# Altium PCB Forearm_GPT.PcbDoc
Units mil, origin at the board's own origin, x right, y up, seen from the top; angles counter-clockwise.
Board outline 10000 x 4500 mil, 2 copper layers (Top Layer, Bottom Layer); 9 components, 10 nets, 103 pads, 15 vias.
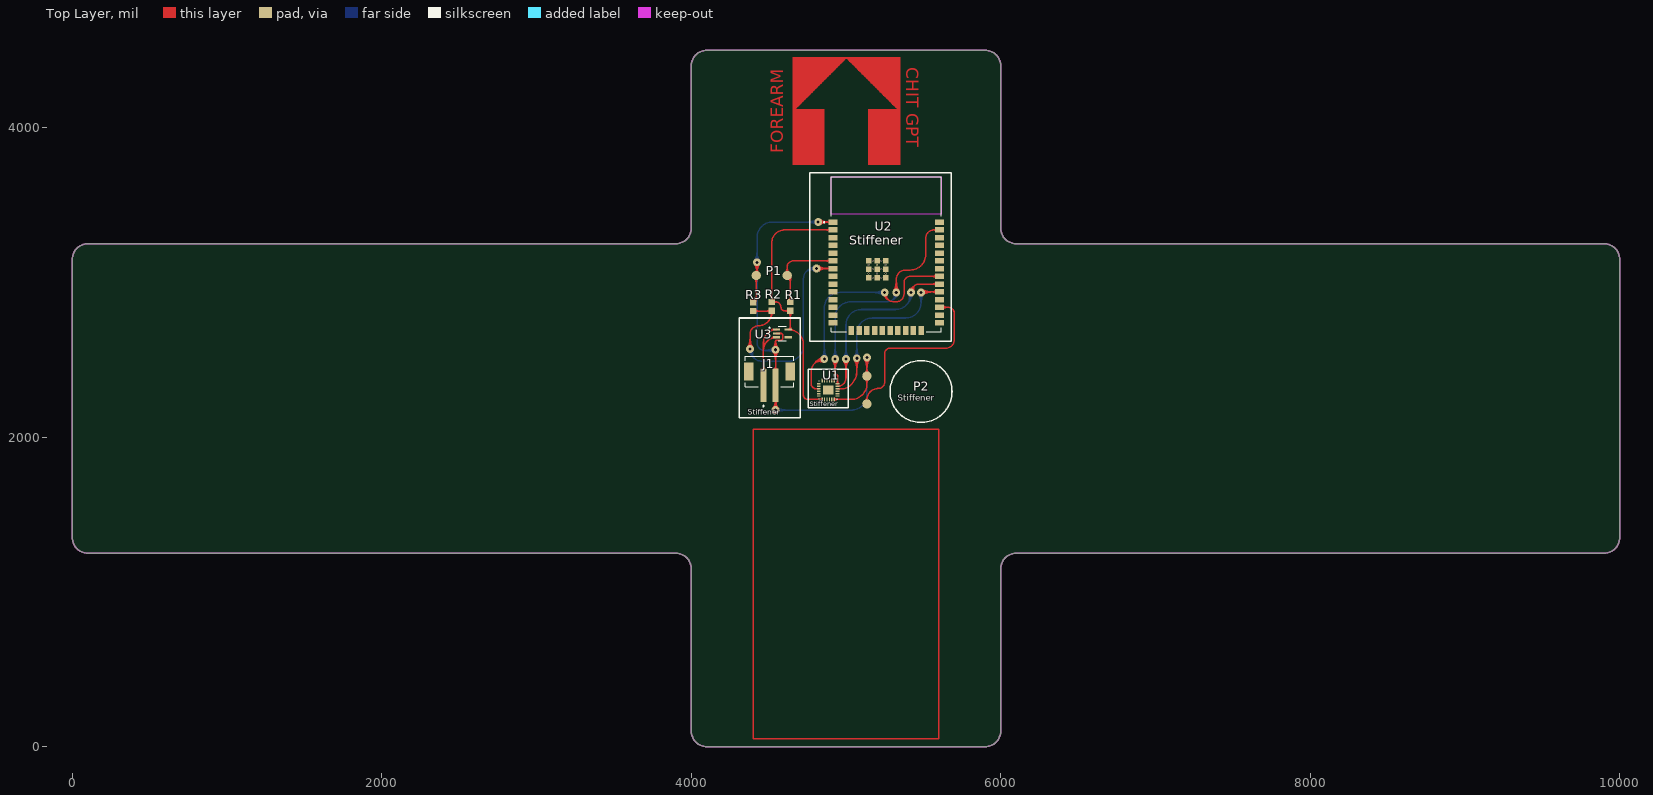
[diagram p0: Top Layer view]
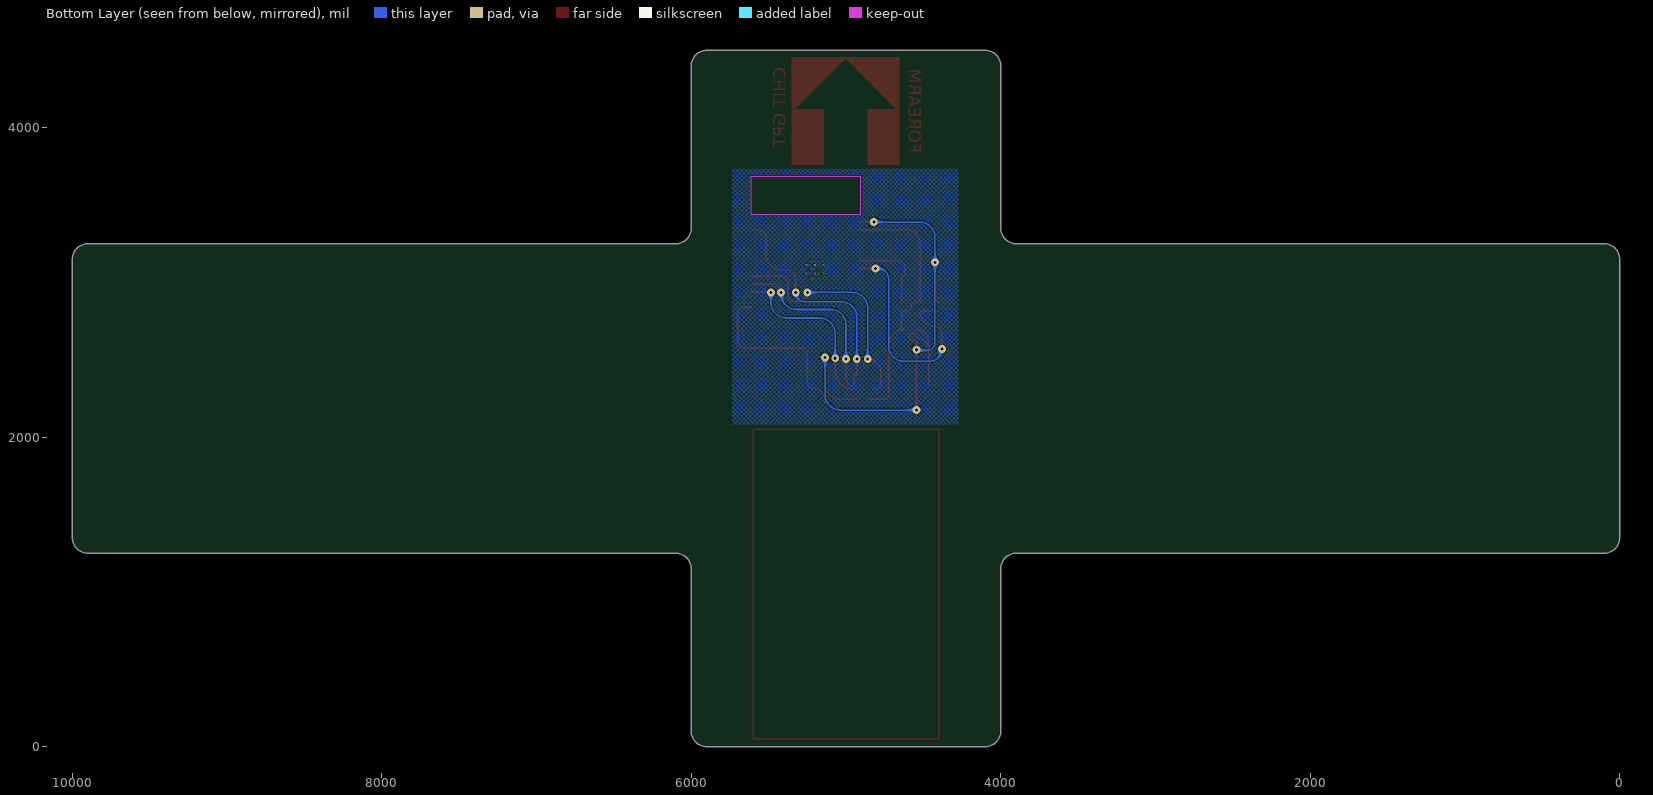
[diagram p1: Bottom Layer view, seen from below]

## Layer stack, top to bottom
Top Solder: solder mask 0.4724, FC-001, Dk 4
Top Solder: solder mask 0.4, Solder Resist, Dk 3.5
Top Layer: signal copper 1.4
Dielectric 1: dielectric 12.6, FR-4, Dk 4.8
Bottom Layer: signal copper 1.4
Flex Bottom Coverlay: solder mask 0.4, Solder Resist, Dk 3.5
Flex Bottom Coverlay: solder mask 0.4724, FC-001, Dk 4

## Board outline
100,1250 3900,1250 cw(c3900,1150) 4000,1150 4000,100 ccw(c4100,100) 4100,0 5900,0 ccw(c5900,100) 6000,100 6000,1150 cw(c6100,1150) 6100,1250 9900,1250 ccw(c9900,1350) 10000,1350 10000,3150 ccw(c9900,3150) 9900,3250 6100,3250 cw(c6100,3350) 6000,3350 6000,4400 ccw(c5900,4400) 5900,4500 4100,4500 ccw(c4100,4400) 4000,4400 4000,3350 cw(c3900,3350) 3900,3250 100,3250 ccw(c100,3150) 0,3150 0,1350 ccw(c100,1350)
board region Main: 5750,0 4250,0 4250,4500 5750,4500
board region "Right Strap": 4250,0 4100,0 4090.15,0 4070.83,3.84 4052.63,11.38 4036.25,22.32 4022.32,36.25 4011.38,52.63 4003.84,70.83 4000,90.15 4000,100 4000,1150 3999.52,1159.8 3995.69,1179.03 3988.19,1197.14 3977.3,1213.44 3963.44,1227.3 3947.14,1238.19 3929.03,1245.69 3909.8,1249.52 3900,1250 100,1250 90.15,1250 70.83,1253.84 52.63,1261.38 36.25,1272.32 22.32,1286.25 11.38,1302.63 3.84,1320.83 0,1340.15 0,1350 0,3150 0,3159.85 3.84,3179.17 11.38,3197.37 22.32,3213.75 36.25,3227.68 52.63,3238.62 70.83,3246.16 90.15,3250 100,3250 3900,3250 3909.8,3250.48 3929.03,3254.31 3947.14,3261.81 3963.44,3272.7 3977.3,3286.56 3988.19,3302.86 3995.69,3320.97 3999.52,3340.2 4000,3350 4000,4400 4000,4409.85 4003.84,4429.17 4011.38,4447.37 4022.32,4463.75 4036.25,4477.68 4052.63,4488.62 4070.83,4496.16 4090.15,4500 4100,4500 4250,4500
board region "Left Strap": 5750,4500 5900,4500 5909.85,4500 5929.17,4496.16 5947.37,4488.62 5963.75,4477.68 5977.68,4463.75 5988.62,4447.37 5996.16,4429.17 6000,4409.85 6000,4400 6000,3350 6000.48,3340.2 6004.31,3320.97 6011.81,3302.86 6022.7,3286.56 6036.56,3272.7 6052.86,3261.81 6070.97,3254.31 6090.2,3250.48 6100,3250 9900,3250 9909.85,3250 9929.17,3246.16 9947.37,3238.62 9963.75,3227.68 9977.68,3213.75 9988.62,3197.37 9996.16,3179.17 10000,3159.85 10000,3150 10000,1350 10000,1340.15 9996.16,1320.83 9988.62,1302.63 9977.68,1286.25 9963.75,1272.32 9947.37,1261.38 9929.17,1253.84 9909.85,1250 9900,1250 6100,1250 6090.2,1249.52 6070.97,1245.69 6052.86,1238.19 6036.56,1227.3 6022.7,1213.44 6011.81,1197.14 6004.31,1179.03 6000.48,1159.8 6000,1150 6000,100 6000,90.15 5996.16,70.83 5988.62,52.63 5977.68,36.25 5963.75,22.32 5947.37,11.38 5929.17,3.84 5909.85,0 5900,0 5750,0

## Design rules (kind name [scope] priority, off if disabled: settings)
Clearance [All] p1: gap=5 ignorepadtopadclearanceinfootprint=FALSE
DiffPairsRouting [All] p1: maxlimit=10 minlimit=10 mostfreqgap=10 toplayer_minwidth=15 toplayer_maxwidth=15 toplayer_prefwidth=15 bottomlayer_minwidth=15 bottomlayer_maxwidth=15 bottomlayer_prefwidth=15 substack1={0EA1E346-DF71-40D0-BE09-5F43E7521303} toplayer_{0ea1e346-df71-40d0-be09-5f43e7521303}_minwidth=15 toplayer_{0ea1e346-df71-40d0-be09-5f43e7521303}_maxwidth=15 toplayer_{0ea1e346-df71-40d0-be09-5f43e7521303}_prefwidth=15 bottomlayer_{0ea1e346-df71-40d0-be09-5f43e7521303}_minwidth=15 bottomlayer_{0ea1e346-df71-40d0-be09-5f43e7521303}_maxwidth=15 bottomlayer_{0ea1e346-df71-40d0-be09-5f43e7521303}_prefwidth=15 maxuncoupledlength=500
PolygonConnect [All] p1: connectstyle=Relief reliefconductorwidth=10 reliefentries=4 polygonreliefangle="90 Angle" airgapwidth=10
RoutingCorners [All] p1: cornerstyle=Round minsetback=100 maxsetback=100
RoutingTopology [All] p1: topology=Vertical
RoutingVias [All] p1: holewidth=18 width=30 viastyle="Through Hole" minholewidth=18 minwidth=30 maxholewidth=20 maxwidth=50
SolderMaskExpansion [All] p1: expansion=4 istentingtop=FALSE
Width [All] p1: maxlimit=10 minlimit=5 preferedwidth=8 substack1={0EA1E346-DF71-40D0-BE09-5F43E7521303} toplayer_{0ea1e346-df71-40d0-be09-5f43e7521303}_minwidth=10 toplayer_{0ea1e346-df71-40d0-be09-5f43e7521303}_prefwidth=10 bottomlayer_{0ea1e346-df71-40d0-be09-5f43e7521303}_minwidth=10 bottomlayer_{0ea1e346-df71-40d0-be09-5f43e7521303}_prefwidth=10
27 further rules are at their usual default settings.

## Components (designator, comment, footprint, x,y, rotation, side; value= is the part's Value field where it differs from the comment)
J1 "B2B-PH-SM4-TB" JST_B2B-PH-SM4-TB 4505.63,2423.58 r0 top
P1 "Strain Gauge" "Strain Gauge" 4520,3045 r0 top
P2 "Vibe Motor" "Vibe Motor" 5485,2295 r90 top
R1 "RC0603FR-07100RL" RESC1607X60N 4640,2845 r90 top
R2 "RC0603FR-07100RL" RESC1607X60N 4520,2845 r270 top
R3 "RC0603FR-07100RL" RESC1607X60N 4400,2843.94 r90 top
U1 "MPU-6500" QFN40P300X300X95-25N 4885,2305 r270 top
U2 "ESP32-WROOM-32E_(16MB)" XCVR_ESP32-WROOM-32E_(16MB) 5260,3182.13 r0 top
U3 "MIC5365-3.3YC5-TR" SOT65P210X110-5N 4588.19,2670 r0 top

## Footprints (in the part's own frame and the unit in brackets; to place one, negate y for a bottom-side part, rotate by r counter-clockwise, add the part's x,y. Pads: shape width x height; smd on the part's side, far side on the other; paste and mask are expansions set on the pad)
JST_B2B-PH-SM4-TB [mm]
  rect 1x5.5 smd: 1(-1,-2.25) 2(1,-2.25)
  rect 1.6x3 smd: S1(-3.4,0) S2(3.4,0)
  silkscreen extent -3.97,-5.76 3.98,2.5, body extent -3.98,-4.5 3.98,2.5, height 6.75
QFN40P300X300X95-25N [mm]
  rrect25% 0.64x0.22 smd: 1(-1.545,1) 2(-1.545,0.6) 3(-1.545,0.2) 4(-1.545,-0.2) 5(-1.545,-0.6) 6(-1.545,-1) 13(1.545,-1) 14(1.545,-0.6) 15(1.545,-0.2) 16(1.545,0.2) 17(1.545,0.6) 18(1.545,1)
  rrect25% 0.22x0.64 smd: 7(-1,-1.545) 8(-0.6,-1.545) 9(-0.2,-1.545) 10(0.2,-1.545) 11(0.6,-1.545) 12(1,-1.545) 19(1,1.545) 20(0.6,1.545) 21(0.2,1.545) 22(-0.2,1.545) 23(-0.6,1.545) 24(-1,1.545)
  rect 1.54x1.7 smd paste-2: 25(0,0)
  silkscreen extent -2.48,-1.5 1.5,1.5
RESC1607X60N [mm]
  rect 1.04x1.02 smd: 1(-0.735,0) 2(0.735,0)
SOT65P210X110-5N [mm]
  rect 1.17x0.4 smd: 1(-0.97,0.65) 2(-0.97,0) 3(-0.97,-0.65) 4(0.97,-0.65) 5(0.97,0.65)
  silkscreen extent -2.2,-1.17 0.63,1.17
"Strain Gauge" [mil]
  round 60 smd: 1(-100,0) 2(100,0)
"Vibe Motor" [mil]
  round 60 smd: 1(-80,350) 2(100,350)
  silkscreen extent -200,-200 200,200
XCVR_ESP32-WROOM-32E_(16MB) [mm]
  rect 1.5x0.9 smd: 1(-8.75,5.26) 2(-8.75,3.99) 3(-8.75,2.72) 4(-8.75,1.45) 5(-8.75,0.18) 6(-8.75,-1.09) 7(-8.75,-2.36) 8(-8.75,-3.63) 9(-8.75,-4.9) 10(-8.75,-6.17) 11(-8.75,-7.44) 12(-8.75,-8.71) 13(-8.75,-9.98) 14(-8.75,-11.25) 25(8.75,-11.25) 26(8.75,-9.98) 27(8.75,-8.71) 28(8.75,-7.44) 29(8.75,-6.17) 30(8.75,-4.9) 31(8.75,-3.63) 32(8.75,-2.36) 33(8.75,-1.09) 34(8.75,0.18) 35(8.75,1.45) 36(8.75,2.72) 37(8.75,3.99) 38(8.75,5.26)
  rect 0.9x1.5 smd: 15(-5.715,-12.5) 16(-4.445,-12.5) 17(-3.175,-12.5) 18(-1.905,-12.5) 19(-0.635,-12.5) 20(0.635,-12.5) 21(1.905,-12.5) 22(3.175,-12.5) 23(4.445,-12.5) 24(5.715,-12.5)
  rect 0.9x0.9 smd: 39_1(-2.9,-1.06) 39_2(-1.5,-1.06) 39_3(-0.1,-1.06) 39_4(-2.9,-2.46) 39_5(-1.5,-2.46) 39_6(-0.1,-2.46) 39_7(-2.9,-3.86) 39_8(-1.5,-3.86) 39_9(-0.1,-3.86)
  round 0.3 hole 0.2 mask+0: 39_10(-2.2,-1.06) 39_11(-0.8,-1.06) 39_12(-2.9,-1.76) 39_13(-1.5,-1.76) 39_14(-0.1,-1.76) 39_15(-2.2,-2.46) 39_16(-0.8,-2.46) 39_17(-2.9,-3.16) 39_18(-1.5,-3.16) 39_19(-0.1,-3.16) 39_20(-2.2,-3.86) 39_21(-0.8,-3.86)
  Keep-Out Layer region: 9,6.56 -9,6.56 -9,12.75 9,12.75
  silkscreen extent -10.3,-12.75 9,12.75, body extent -9,-12.75 9,12.75, height 3.25

## Part data
J1: "Connector Header Surface Mount 2 position 0.079 (2.00mm)", Package="NON STANDARD-2 JST", Availability="In Stock", Check_prices=https://www.snapeda.com/parts/B2B-PH-SM4-TB/JST/view-part/?ref=eda, MF=JST, MP=B2B-PH-SM4-TB, Price=None, Purchase-URL=https://pricing.snapeda.com/search/part/B2B-PH-SM4-TB/?ref=eda, SnapEDA_Link=https://www.snapeda.com/parts/B2B-PH-SM4-TB/JST/view-part/?ref=snap
R1 R2 R3: "RES SMT 100R 1% 0603 T/R PICK#92931", Package=None, Availability=Unavailable, MP=RC0603FR-07100RL, Price=None
U1: "Accelerometer, Gyroscope, 6 Axis Sensor IÂ²C, SPI Output", Package="QFN-24 TDK", Availability=Warning, DigiKey-Purchase-URL=https://snapeda.com/shop?store=DigiKey&id=48597, MF="TDK InvenSense", Mouser-Purchase-URL=https://snapeda.com/shop?store=Mouser&id=48597, MP=MPU-6500, Price=None, SnapEDA_Link=https://www.snapeda.com/parts/MPU-6500/TDK%20InvenSense/view-part/48597/?ref=snap
U2: "Bluetooth, WiFi 802.11b/g/n, Bluetooth v4.2 +EDR, Class 1, 2 and 3 Transceiver Module 2.4GHz ~ 2.5GHz Integrated, Trace Surface Mount", Package=None, Availability="Not in stock", Check_prices=https://www.snapeda.com/parts/ESP32-WROOM-32E%20(16MB)/Espressif+Systems/view-part/?ref=eda, MF="Espressif Systems", MP="ESP32-WROOM-32E (16MB)", Price=None, SnapEDA_Link=https://www.snapeda.com/parts/ESP32-WROOM-32E%20(16MB)/Espressif+Systems/view-part/?ref=snap
U3: "Linear Voltage Regulator IC 1 Output 150mA SC-70-5", Package=None, Availability=Unavailable, MP=MIC5365-3.3YC5-TR, Price=None

## Via types
v1: diameter 50, hole 20, Top Layer to Bottom Layer, 15 vias

## Nets (pads, with @x,y where several pads share a name; then routed paths per layer and width w, separated by ;. In a path a pad name is that pad's centre, name@x,y a point inside that pad or via, vN(x,y) a via of type N, cw(c..) or ccw(c..) an arc to the next point about the centre after c; other vN are vias at no path point)
3.3V: R1.1 R2.1 U1.13 U2.2 U3.5 | length 1723.2
  Top Layer w10: U1.13 4750.83,2244.17 cw(c4750.83,2270) 4725,2270 4725,2596.97 ccw(c4626.38,2596.97) U3.5 ccw(c4626.38,2709.21) 4640,2709.21 R1.1 4603.94,2816.06 cw(c4603.94,2840) 4580,2840 ccw(c4546.06,2840) 4546.06,2873.94 R2.1 4520,3255 cw(c4604.21,3255) 4604.21,3339.21 U2.2
ADO/SDO: U1.9 U2.31 | length 1567.8
  Top Layer w10: U1.9 4807.13,2312.87 cw(c4807.13,2345) 4775,2345 4775,2420 cw(c4860,2420) v1(4860,2505) ; v1(5250,2935) ccw(c5310,2935) 5310,2875 5325,2875 ccw(c5325,2925) 5375,2925 5375,3000 cw(c5414.21,3000) 5414.21,3039.21 U2.31
  Bottom Layer w10: v1(4860,2505) 4860,2835 cw(c4960,2835) 4960,2935 v1(5250,2935)
GND: J1.2 P1.1 P2.2 R3.2 U1.18 U2.1 U3.2 | length 3548
  Top Layer w10: R3.2 ccw(c4400,2892.87) 4420,2892.87 P1.1 ccw(c4420,3050) 4425,3050 v1(4425,3130) ; v1(4545,2175) J1.2 v1(4545,2565) 4545,2620 cw(c4554.38,2616.54) 4554.38,2626.54 4584.14,2626.54 4590,2632.39 4590,2664.14 4584.14,2670 U3.2 ; v1(4820,3390) 4914.72,3390 cw(c4914.72,3389.21) U2.1 ; U1.18 5035,2244.17 ccw(c5035,2344.17) 5135,2344.17 P2.2 v1(5135,2515)
  Bottom Layer w10: v1(4545,2175) 5035,2175 ccw(c5035,2275) 5135,2275 v1(5135,2515) ; v1(4545,2565) 4545,2560 4475,2560 cw(c4475,2610) 4425,2610 4425,3290 cw(c4525,3290) 4525,3390 v1(4820,3390)
NetJ1_1: J1.1 U3.1 U3.3 | length 530.5
  Top Layer w10: J1.1 4466.26,2560.67 cw(c4550,2560.67) 4466.76,2569.81 ; U3.3 ccw(c4550,2560.67) 4466.76,2569.81 ; U3.1 ccw(c4550,2612.35) 4466.76,2612.35 4466.76,2569.81
NetP1_2: P1.2 R1.2 U2.6 | length 555.4
  Top Layer w10: R1.2 4640,3025 ccw(c4620,3025) P1.2 4620,3100 cw(c4659.21,3100) 4659.21,3139.21 U2.6
NetR2_2: R2.2 R3.1 U2.7 | length 1557.4
  Top Layer w10: v1(4380,2570) 4380,2665 cw(c4435,2665) 4435,2720 ccw(c4435,2805) 4520,2805 R2.2 cw(c4518.94,2816.06) 4518.94,2815 R3.1 ; v1(4810,3090) 4914.72,3090 cw(c4914.72,3089.21) U2.7
  Bottom Layer w10: v1(4380,2570) ccw(c4460,2570) 4460,2490 4625,2490 ccw(c4625,2590) 4725,2590 4725,3025 cw(c4790,3025) 4790,3090 v1(4810,3090)
NetU1_22: U1.22 U2.29 | length 1151.4
  Top Layer w10: U1.22 4967.81,2311.87 4968.04,2311.86 ccw(c4968.04,2402.71) 5029.28,2335.6 ccw(c4945.08,2427.87) 5070,2427.87 v1(5070,2510) ; v1(5485,2935) cw(c5489.21,2935) 5489.21,2939.21 U2.29
  Bottom Layer w10: v1(5070,2510) 5070,2670 cw(c5170,2670) 5170,2770 5385,2770 ccw(c5385,2870) 5485,2870 v1(5485,2935)
NetU1_23: U1.23 U2.30 | length 1186.9
  Top Layer w10: U1.23 ccw(c4945.83,2382.8) 4955.94,2329.57 4959.41,2330.23 ccw(c4957.34,2341.12) 4961.16,2330.72 4964.47,2331.93 ccw(c4945.83,2382.8) 5000,2382.8 v1(5000,2505) ; v1(5420,2935) cw(c5474.21,2935) 5474.21,2989.21 U2.30
  Bottom Layer w10: v1(5000,2505) 5000,2725 cw(c5100,2725) 5100,2825 5320,2825 ccw(c5320,2925) 5420,2925 v1(5420,2935)
NetU1_24: U1.24 U2.37 | length 1517.8
  Top Layer w10: v1(4930,2505) 4930,2410 ccw(c4935,2410) 4935,2405 cw(c4935,2394.17) 4945.83,2394.17 U1.24 ; v1(5325,2935) 5325,3020 cw(c5385,3020) 5385,3080 5415,3080 ccw(c5415,3180) 5515,3180 5515,3285 cw(c5569.21,3285) 5569.21,3339.21 U2.37
  Bottom Layer w10: v1(4930,2505) 4930,2775 cw(c5030,2775) 5030,2875 5265,2875 ccw(c5265,2935) v1(5325,2935)
VIB: P2.1 U2.27 | length 1179.9
  Top Layer w10: P2.1 5135,2240 cw(c5210,2240) 5210,2315 ccw(c5210,2355) 5250,2355 5250,2540 cw(c5285,2540) 5285,2575 5645,2575 ccw(c5645,2630) 5700,2630 5700,2800 ccw(c5660.79,2800) 5660.79,2839.21 U2.27
pads on no net: J1.S1 J1.S2 U1.1 U1.2 U1.3 U1.4 U1.5 U1.6 U1.7 U1.8 U1.10 U1.11 U1.12 U1.14 U1.15 U1.16 U1.17 U1.19 U1.20 U1.21 U1.25 U2.3 U2.4 U2.5 U2.8 U2.9 U2.10 U2.11 U2.12 U2.13 U2.14 U2.15 U2.16 U2.17 U2.18 U2.19 U2.20 U2.21 U2.22 U2.23 U2.24 U2.25 U2.26 U2.28 U2.32 U2.33 U2.34 U2.35 U2.36 U2.38 U2.39_1 U2.39_2 U2.39_3 U2.39_4 U2.39_5 U2.39_6 U2.39_7 U2.39_8 U2.39_9 U2.39_10 U2.39_11 U2.39_12 U2.39_13 U2.39_14 U2.39_15 U2.39_16 U2.39_17 U2.39_18 U2.39_19 U2.39_20 U2.39_21 U3.4
copper on no net: | length 6400
  Top Layer w10: 4400,50 5600,50 5600,2050 4400,2050 4400,50

## Polygon pours and split planes (outlines as drawn)
GND on Bottom Layer "GND_L02_P006" (hatched 45Degree grid 20 track 8, pour order 6): 4270,2080 4270,3730 5735,3730 5735,2080
no net on Layer0 "Default Coverlay 2 Top" (split plane): 5750,0 4250,0 4250,4500 5750,4500
no net on Layer0 "Default Coverlay 2 Bottom" (split plane): 5750,0 4250,0 4250,4500 5750,4500

## Keep-outs
Top Layer:
  the board outline again, w10

## Other copper
Top Layer:
  region: 305 vertices and 0 holes, not listed, extent 4654.74,3759.48 5349.74,4454.48
  text "CHIT GPT" at 5390,4390 h80 r270
  text "FOREARM" at 4595,3835 h80 r90

## Silkscreen, mask and mechanical layers (free items; w line width, h text height)
Top Overlay:
  lines w10: 4310,2125 4705,2125 4705,2770 4310,2770 4310,2125 ; 4755,2190 5015,2190 5015,2440 4755,2440 4755,2190 ; 4765,2620 5680,2620 5680,3710 4765,3710 4765,2620
  text "Stiffener" at 5020,3245 h60
  text "Stiffener" at 5335,2235 h40
  text "Stiffener" at 4765,2200 h30
  text "Stiffener" at 4365,2145 h35

## Text inside footprints (layer, text, board x,y; h text height)
U2: Mechanical 13 "ANTENNA" at 5023.78,3536.46 h70